# EAGLE board armachat-panel2 (EAGLE 7.6.0)

Size 99.06 x 99.06 mm. Coordinates in mm from the lower left corner, seen from the top.
Outline: 0,97.79 0,1.27 arc90 1.27,0 97.79,0 arc90 99.06,1.27 99.06,97.79 arc90 97.79,99.06 1.27,99.06 arc90 0,97.79
Outline: 27.3,92.08 71.12,92.08 71.12,59.69 27.3,59.69 27.3,92.08
Outline: 2.54,86.36 5.08,86.36 5.08,80.65 2.54,80.65 2.54,86.36
Outline: circle at 8.89,38.73 radius 2.03
Outline: circle at 16.51,38.73 radius 2.03
Outline: circle at 24.13,38.73 radius 2.03
Outline: circle at 31.75,38.73 radius 2.03
Outline: circle at 39.37,38.73 radius 2.03
Outline: circle at 46.99,38.73 radius 2.03
Outline: circle at 54.61,38.73 radius 2.03
Outline: circle at 62.23,38.73 radius 2.03
Outline: circle at 69.85,38.73 radius 2.03
Outline: circle at 77.47,38.73 radius 2.03
Outline: circle at 95.25,38.42 radius 2.03
Outline: circle at 5.08,29.21 radius 2.03
Outline: circle at 12.7,29.21 radius 2.03
Outline: circle at 20.32,29.21 radius 2.03
Outline: circle at 27.94,29.21 radius 2.03
Outline: circle at 35.56,29.21 radius 2.03
Outline: circle at 43.18,29.21 radius 2.03
Outline: circle at 50.8,29.21 radius 2.03
Outline: circle at 58.42,29.21 radius 2.03
Outline: circle at 66.04,29.21 radius 2.03
Copper layers (1*16): Top 0.0356mm / dielectric 1.5011mm / Bottom 0.0356mm
Design rules "LaenPCBOrder *": minimum track width 6mil, minimum drill 13mil, track to track 6mil, track to pad 6mil, pad to pad 6mil, via to via 6mil, smd to smd 6mil, copper to edge 15mil, drill to drill 6mil, minimum pad ring 7mil, minimum via ring 7mil, stop-mask expansion 4mil, vias tented up to drill 30mil, thermal gap 10mil
Net classes: 0 default: width 0.203 mm, drill 0.356 mm, clearance 0.203 mm; 1 gnd: width 0.203 mm, drill 0.356 mm, clearance 0.203 mm; 2 vcc: width 0.203 mm, drill 0.356 mm, clearance 0.203 mm

## Placement (x,y rotation side)
U$1  [BIOHAZARD_10.00]  78.74,59.69 0 top
U$2  [RADIOACTIVE_10.00]  78.11,73.66 0 top

## Library data of the parts
U$1 U$2 = logo

## Text on the board
Top: ARMACHAT | Bobricius / 2020
tNames: LORA - 868MHz | BAT | USB | RX | TX | DOOMSDAY COMMUNICATOR | 1! | 2@ | 3# | 4$ | 5% | 6^ | 7& | 8* | 9( | 0) | DELETE | Q | W | E | R | T | Y | U | I | O | P | A | S | D | F | G | H | J | K | L | ENTER | Z | X | C | V | B | N | M | SPACE | www.PeMi.Technology - Factory For Materializing Dreams